# EAGLE board demeter (EAGLE 6.2)
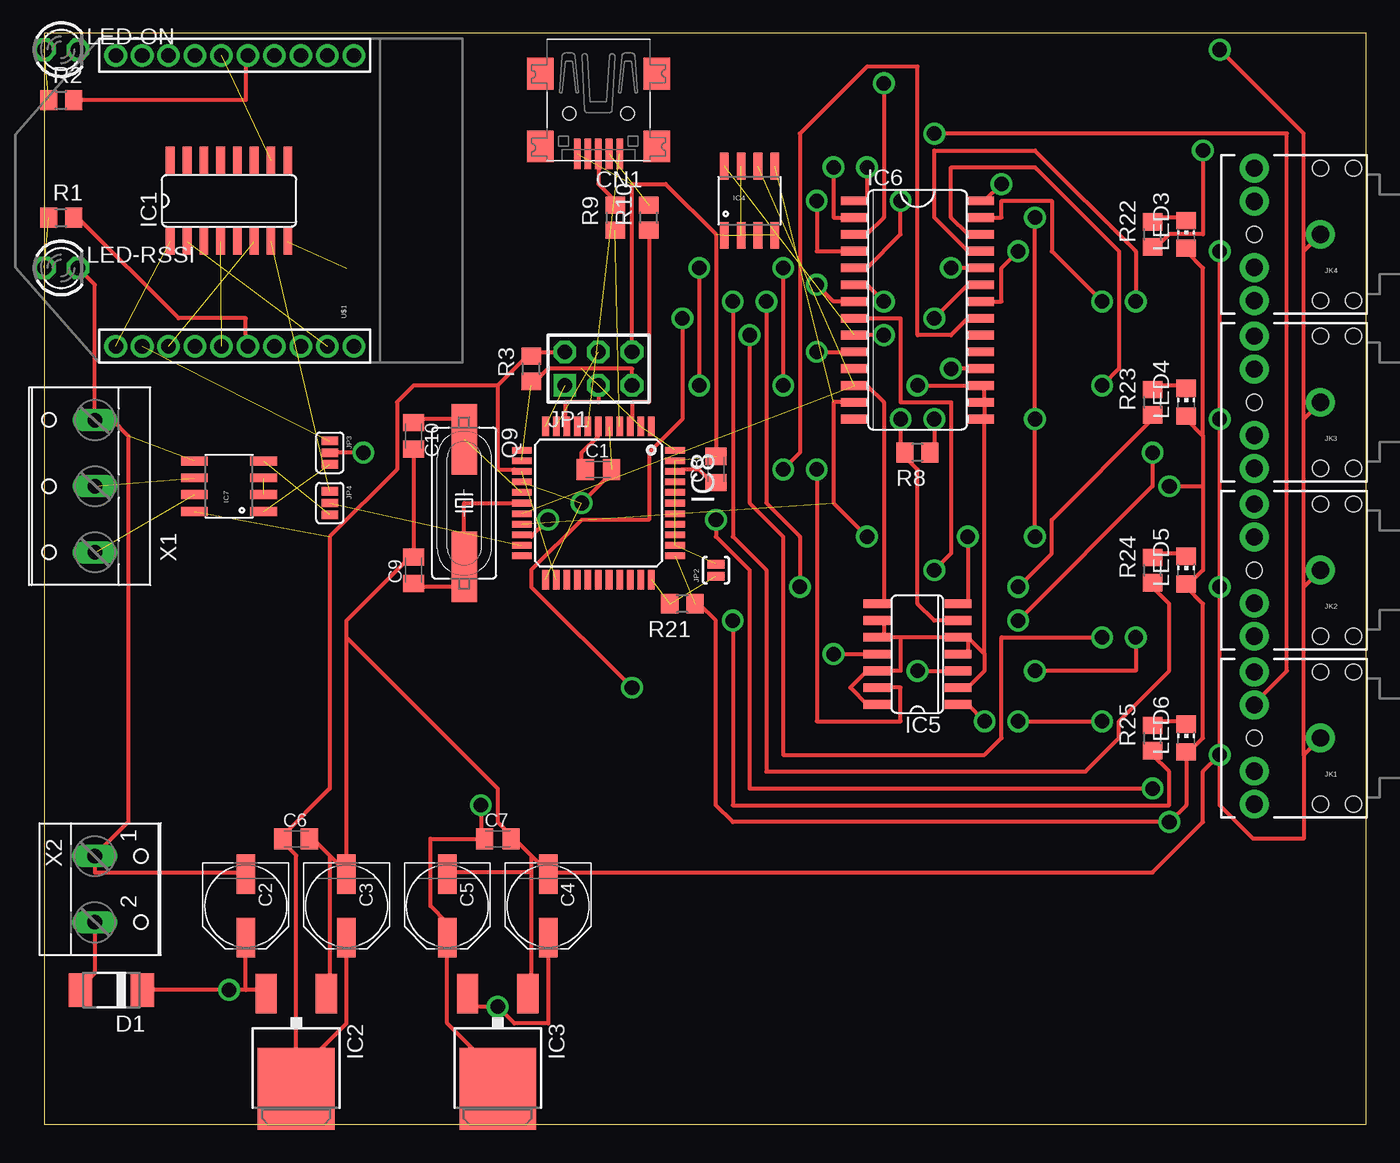
[diagram p0: board, top side]
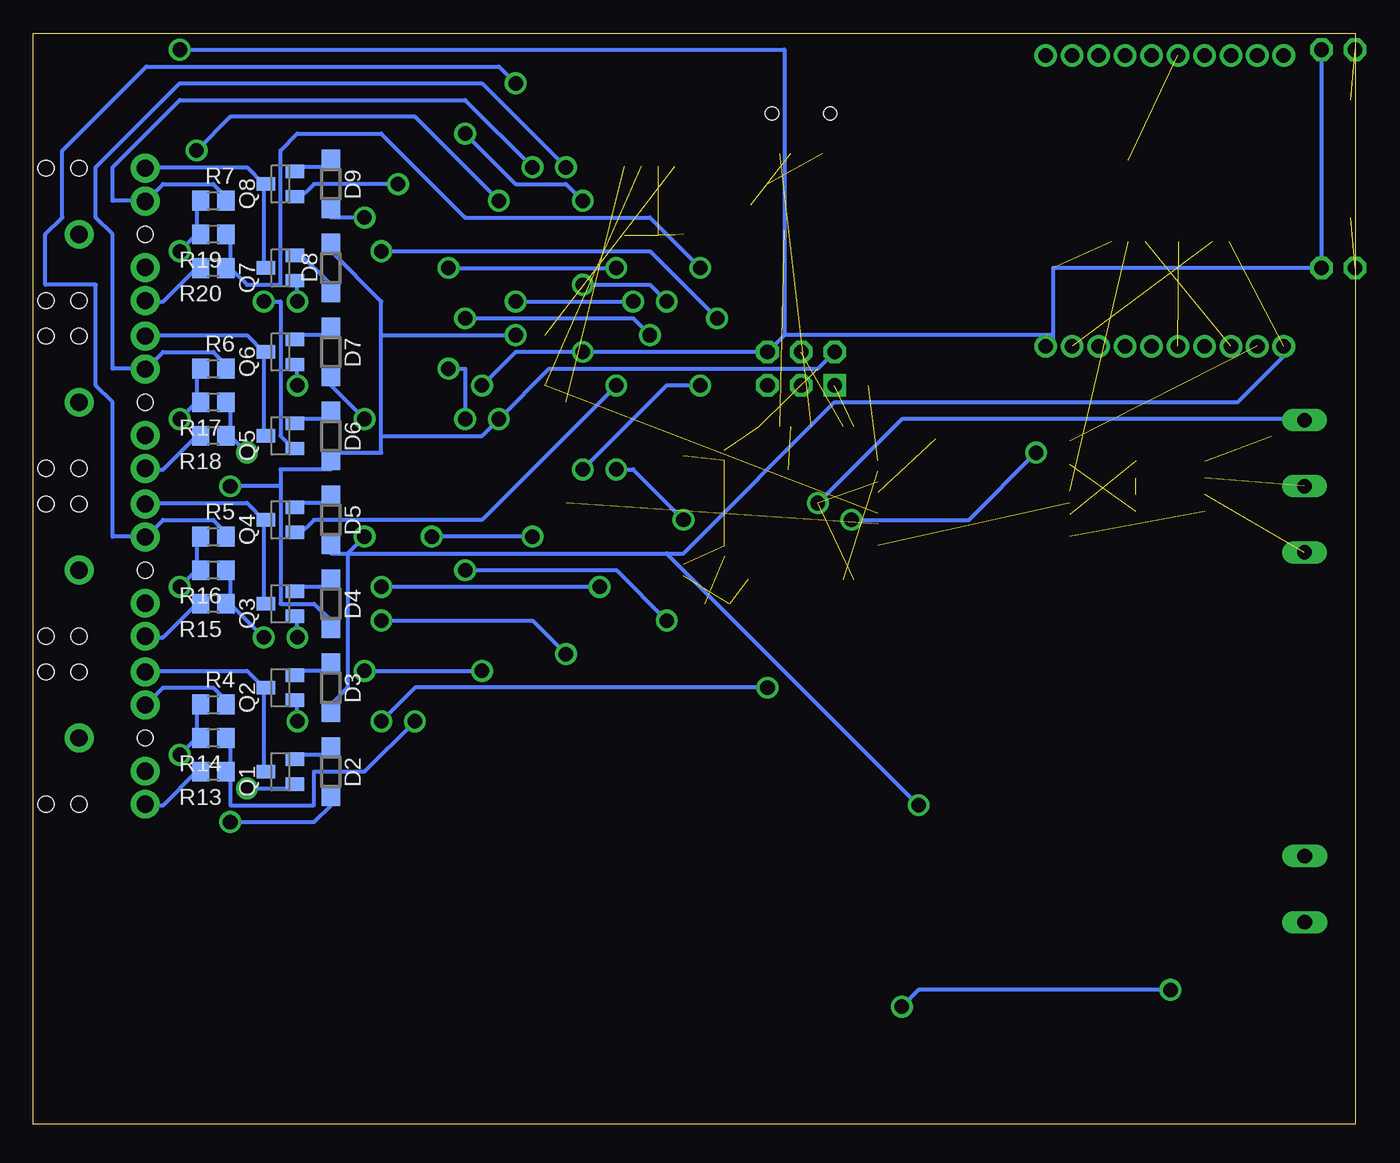
[diagram p1: board, bottom side, seen from below]

Size 100 x 82.54 mm. Coordinates in mm from the lower left corner, seen from the top.
Outline: 0,0 100,0 100,82.54 0,82.54 0,0
Copper layers (1*16): Top 0.035mm / dielectric 1.5mm / Bottom 0.035mm
Design rules: minimum track width 12mil, minimum drill 1.1mm, track to track 8mil, track to pad 8mil, pad to pad 8mil, via to via 8mil, smd to smd 8mil, copper to edge 10mil, drill to drill 8mil, minimum pad ring 12mil, minimum via ring 10mil, stop-mask expansion 4mil, vias tented up to drill 25mil, thermal gap 10mil

## Footprints (pad centres in the part's own frame; a part is rotated, then mirrored left to right if it is on the bottom)
C0805K = smd 1.3 x 1.6: 1 -1,0; 2 1,0
PANASONIC_D = smd 3 x 1.4: + 2.4,0; - -2.4,0
USB-MINIB = smd 0.5 x 2.308: D+ 0,4.064; D- -0.8,4.064; GND 1.6,4.064; ID 0.8,4.064; VBUS -1.6,4.064 | smd 2 x 2.4: GND1 -4.4,-2; GND2 -4.4,3.5; GND3 4.4,3.5; GND4 4.4,-2 | hole 1: -2.2,1; 2.2,1
DO-214AC = smd 1.778 x 2.54: A 2.342,0; C -2.342,0
SOD123 = smd 1.4 x 1.4: A 1.9,0; C -1.9,0
SO16 = smd 0.66 x 2.032: 1 -4.445,-3.073; 2 -3.175,-3.073; 3 -1.905,-3.073; 4 -0.635,-3.073; 5 0.635,-3.073; 6 1.905,-3.073; 7 3.175,-3.073; 8 4.445,-3.073; 9 4.445,3.073; 10 3.175,3.073; 11 1.905,3.073; 12 0.635,3.073; 13 -0.635,3.073; 14 -1.905,3.073; 15 -3.175,3.073; 16 -4.445,3.073
DPACK = smd 1.6 x 3: 1 -2.28,-4.8; 3 2.28,-4.8 | smd 5.8 x 6.2: 4 0,2.38
SO08 = smd 0.66 x 2.032: 1 -1.905,-2.616; 2 -0.635,-2.616; 3 0.635,-2.616; 4 1.905,-2.616; 5 1.905,2.616; 6 0.635,2.616; 7 -0.635,2.616; 8 -1.905,2.616
SO14 = smd 2.032 x 0.66: 1 -3.073,3.81; 2 -3.073,2.54; 3 -3.073,1.27; 4 -3.073,0; 5 -3.073,-1.27; 6 -3.073,-2.54; 7 -3.073,-3.81; 8 3.073,-3.81; 9 3.073,-2.54; 10 3.073,-1.27; 11 3.073,0; 12 3.073,1.27; 13 3.073,2.54; 14 3.073,3.81
SO28W = smd 0.66 x 2.032: 1 -7.62,-4.78; 2 -6.35,-4.78; 3 -5.08,-4.78; 4 -3.81,-4.78; 5 -2.54,-4.78; 6 -1.27,-4.78; 7 0,-4.78; 8 1.27,-4.78; 9 2.54,-4.78; 10 3.81,-4.78; 11 5.08,-4.78; 12 6.35,-4.78; 13 7.62,-4.78; 14 8.89,-4.78; 15 8.89,4.78; 16 7.62,4.78; 17 6.35,4.78; 18 5.08,4.78; 19 3.81,4.78; 20 2.54,4.78; 21 1.27,4.78; 22 0,4.78; 23 -1.27,4.78; 24 -2.54,4.78; 25 -3.81,4.78; 26 -5.08,4.78; 27 -6.35,4.78; 28 -7.62,4.78
TQFP44 = smd 1.5 x 0.5: 1 -5.8,4; 2 -5.8,3.2; 3 -5.8,2.4; 4 -5.8,1.6; 5 -5.8,0.8; 6 -5.8,0; 7 -5.8,-0.8; 8 -5.8,-1.6; 9 -5.8,-2.4; 10 -5.8,-3.2; 11 -5.8,-4; 23 5.8,-4; 24 5.8,-3.2; 25 5.8,-2.4; 26 5.8,-1.6; 27 5.8,-0.8; 28 5.8,0; 29 5.8,0.8; 30 5.8,1.6; 31 5.8,2.4; 32 5.8,3.2; 33 5.8,4 | smd 0.5 x 1.5: 12 -4,-5.8; 13 -3.2,-5.8; 14 -2.4,-5.8; 15 -1.6,-5.8; 16 -0.8,-5.8; 17 0,-5.8; 18 0.8,-5.8; 19 1.6,-5.8; 20 2.4,-5.8; 21 3.2,-5.8; 22 4,-5.8; 34 4,5.8; 35 3.2,5.8; 36 2.4,5.8; 37 1.6,5.8; 38 0.8,5.8; 39 0,5.8; 40 -0.8,5.8; 41 -1.6,5.8; 42 -2.4,5.8; 43 -3.2,5.8; 44 -4,5.8
AUDIO-JACK = drill 1.3 pad 2.184: RING 5,5; RSH 5,2.5; SLEEVE 0,0; TIP 5,-5; TSH 5,-2.5 | hole 1.2: 0,5; -2.5,5; -2.5,-5; 0,-5; 5,0
AVR-ISP-6 = drill 1.1 square: 1 -2.54,-1.27 | drill 1.1 octagon: 2 -2.54,1.27; 3 0,-1.27; 4 0,1.27; 5 2.54,-1.27; 6 2.54,1.27
SJ_2S-NO = smd 0.635 x 1.27: 1 -0.45,0; 2 0.45,0
SJ_3 = smd 0.635 x 1.27: 1 -0.889,0; 2 0,0; 3 0.889,0
CHIP-LED0805 = smd 1.5 x 1.3: A 0,-1.05; C 0,1.05
LED3MM = drill 1.1 octagon: A -1.27,0; K 1.27,0
SOT23 = smd 1 x 1.4: 1 -0.95,-1.1; 2 0.95,-1.1; 3 0,1.1
HC49UP = smd 5.334 x 1.93: 1 -4.826,0; 2 4.826,0
R0805 = smd 1.3 x 1.5: 1 -0.95,0; 2 0.95,0
XBEE-1 = drill 1.1: 1 -11,20; 2 -11,18; 3 -11,16; 4 -11,14; 5 -11,12; 6 -11,10; 7 -11,8; 8 -11,6; 9 -11,4; 10 -11,2; 11 11,2; 12 11,4; 13 11,6; 14 11,8; 15 11,10; 16 11,12; 17 11,14; 18 11,16; 19 11,18; 20 11,20
W237-103 = drill 1.1 long: 1 -5,-1.29; 2 0,-1.29; 3 5,-1.29
W237-102 = drill 1.1 long: 1 -2.5,-1.27; 2 2.5,-1.27

## Placement (x,y rotation side)
C1  1uF  [C0805K]  41.91,49.53 0 top
C2  22uF  [PANASONIC_D]  15.24,16.51 270 top
C3  100uF  [PANASONIC_D]  22.86,16.51 270 top
C4  22uF  [PANASONIC_D]  38.1,16.51 270 top
C5  100uF  [PANASONIC_D]  30.48,16.51 270 top
C6  100nF  [C0805K]  19.05,21.59 0 top
C7  100nF  [C0805K]  34.29,21.59 0 top
C8  100nF  [C0805K]  50.8,49.53 90 top
C9  22pF  [C0805K]  27.94,41.91 90 top
C10  22pF  [C0805K]  27.94,52.07 270 top
CN1  [USB-MINIB]  41.91,77.47 180 top
D1  S1M  [DO-214AC]  5.08,10.16 180 top
D2  [SOD123]  77.47,26.67 270 bottom
D3  [SOD123]  77.47,33.02 270 bottom
D4  [SOD123]  77.47,39.37 270 bottom
D5  [SOD123]  77.47,45.72 270 bottom
D6  [SOD123]  77.47,52.07 270 bottom
D7  [SOD123]  77.47,58.42 270 bottom
D8  [SOD123]  77.47,64.77 90 bottom
D9  [SOD123]  77.47,71.12 270 bottom
IC1  4050  [SO16]  13.97,69.85 0 top
IC2  LM1117-5.0  [DPACK]  19.05,5.08 180 top
IC3  LM1117-3.3  [DPACK]  34.29,5.08 180 top
IC4  M24C64  [SO08]  53.34,69.85 0 top
IC5  MCP3424  [SO14]  66.04,35.56 180 top
IC6  MCP23017SO  [SO28W]  66.04,62.23 270 top
IC7  MAX485  [SO08]  13.97,48.26 90 top
IC8  ATMEGA32U4-AU  [TQFP44]  41.91,46.99 270 top
JK1  [AUDIO-JACK]  96.52,29.21 180 top
JK2  [AUDIO-JACK]  96.52,41.91 180 top
JK3  [AUDIO-JACK]  96.52,54.61 180 top
JK4  [AUDIO-JACK]  96.52,67.31 180 top
JP1  AVR-ISP-6  [AVR-ISP-6]  41.91,57.15 0 top
JP2  [SJ_2S-NO]  50.8,41.91 90 top
JP3  JUMPER-3SMD  [SJ_3]  21.59,50.8 270 top
JP4  JUMPER-3SMD  [SJ_3]  21.59,46.99 270 top
LED3  [CHIP-LED0805]  86.36,67.31 0 top
LED4  [CHIP-LED0805]  86.36,54.61 0 top
LED5  [CHIP-LED0805]  86.36,41.91 0 top
LED6  [CHIP-LED0805]  86.36,29.21 0 top
LED-ON  [LED3MM]  1.27,81.28 0 top
LED-RSSI  [LED3MM]  1.27,64.77 0 top
Q1  IRLML6402  [SOT23]  81.28,26.67 90 bottom
Q2  [SOT23]  81.28,33.02 90 bottom
Q3  IRLML6402  [SOT23]  81.28,39.37 90 bottom
Q4  [SOT23]  81.28,45.72 90 bottom
Q5  IRLML6402  [SOT23]  81.28,52.07 90 bottom
Q6  [SOT23]  81.28,58.42 90 bottom
Q7  IRLML6402  [SOT23]  81.28,64.77 90 bottom
Q8  [SOT23]  81.28,71.12 90 bottom
Q9  [HC49UP]  31.75,46.99 270 top
R1  [R0805]  1.27,68.58 0 top
R2  [R0805]  1.27,77.47 0 top
R3  [R0805]  36.83,57.15 90 top
R4  [R0805]  86.36,31.75 0 bottom
R5  [R0805]  86.36,44.45 0 bottom
R6  [R0805]  86.36,57.15 0 bottom
R7  [R0805]  86.36,69.85 0 bottom
R8  [R0805]  66.04,50.8 180 top
R9  22  [R0805]  43.18,68.58 90 top
R10  22  [R0805]  45.72,68.58 90 top
R13  [R0805]  86.36,26.67 180 bottom
R14  [R0805]  86.36,29.21 180 bottom
R15  [R0805]  86.36,39.37 180 bottom
R16  [R0805]  86.36,41.91 180 bottom
R17  [R0805]  86.36,54.61 180 bottom
R18  [R0805]  86.36,52.07 180 bottom
R19  [R0805]  86.36,67.31 180 bottom
R20  [R0805]  86.36,64.77 180 bottom
R21  [R0805]  48.26,39.37 180 top
R22  [R0805]  83.82,67.31 90 top
R23  [R0805]  83.82,54.61 90 top
R24  [R0805]  83.82,41.91 90 top
R25  [R0805]  83.82,29.21 90 top
U$1  XBEE-1B1  [XBEE-1]  25.4,69.85 90 top
X1  [W237-103]  2.54,48.26 90 top
X2  [W237-102]  5.08,17.78 270 top

## Library data of the parts
C1-C10 CN1 D1-D9 IC1-IC4 IC7 IC8 JK1-JK4 JP1-JP4 LED3-LED6 Q1-Q9 R1-R10 R13-R25 U$1 X1 X2 = mark_2
IC5 = mark_2; MPN: MCP3424-E/SL; OC_FARNELL: 1630424; OC_NEWARK: 54M4871; PACKAGE: SOIC-14; SUPPLIER: Microchip
IC6 = mark_2; MF: MICROCHIP; MPN: MCP23017-E/SO; OC_FARNELL: 1332087; OC_NEWARK: 31K2958
LED-ON LED-RSSI = mark_1

## Nets
+3V3: C5.+ C7.1 D3.A D5.A D7.A D9.A IC1.1 IC3.4 U$1.1
+5V: C3.+ C6.1 D2.A D4.A D6.A D8.A IC2.4 IC4.8 IC5.6 IC6.9 IC7.8 IC8.2 IC8.14 IC8.24 IC8.34 IC8.44 JP1.2 LED3.A LED4.A LED5.A LED6.A R3.2 R8.2 R21.1
+12V: C2.+ C4.+ D1.C IC2.3 IC3.3
CH1: IC5.1 R13.1 R14.1
CH2: IC5.3 R15.1 R16.1
CH3: IC5.11 R17.1 R18.1
CH4: IC5.13 R19.1 R20.1
CTS: U$1.12
D+: IC8.4 R9.1
D-: IC8.3 R10.1
DI: IC7.4 JP4.3
DIN: IC1.7 JP4.1
DOUT: JP3.1 U$1.2
DTR: IC1.3
EN: IC7.2 IC7.3
EN1-3: IC6.22 Q2.1
EN1-5: IC6.21 Q1.1
EN2-3: IC6.24 Q4.1
EN2-5: IC6.23 Q3.1
EN3-3: IC6.26 Q6.1
EN3-5: IC6.25 Q5.1
EN4-3: IC6.28 Q8.1
EN4-5: IC6.27 Q7.1
GND: C1.2 C2.- C3.- C4.- C5.- C6.2 C7.2 C8.2 C9.2 C10.2 CN1.GND IC1.8 IC2.1 IC3.1 IC4.1 IC4.2 IC4.3 IC4.4 IC4.7 IC5.2 IC5.4 IC5.5 IC5.9 IC5.10 IC5.12 IC5.14 IC6.10 IC6.15 IC6.16 IC6.17 IC7.5 IC8.5 IC8.15 IC8.23 IC8.35 IC8.43 JK1.SLEEVE JK2.SLEEVE JK3.SLEEVE JK4.SLEEVE JP1.6 JP2.2 LED-ON.K LED-RSSI.K R4.1 R5.1 R6.1 R7.1 R14.2 R16.2 R17.2 R19.2 U$1.10 X1.3 X2.1
MISO: IC8.11 JP1.1
MOSI: IC8.10 JP1.4
N$1: D1.A X2.2
N$2: IC7.7 X1.1
N$3: IC1.6 U$1.3
N$4: IC1.4 U$1.5
N$5: IC7.6 X1.2
N$6: LED-RSSI.A R1.1
N$7: IC1.2 U$1.9
N$8: IC1.10 U$1.16
N$9: LED-ON.A R2.1
N$10: R2.2 U$1.15
N$11: IC6.18 R8.1
N$12: JK1.TIP Q1.3 Q2.3
N$13: D2.C Q1.2
N$14: D3.C Q2.2
N$15: JK2.TIP Q3.3 Q4.3
N$16: D4.C Q3.2
N$17: D5.C Q4.2
N$18: JK3.TIP Q5.3 Q6.3
N$19: D6.C Q5.2
N$20: D7.C Q6.2
N$21: JK4.TIP Q7.3 Q8.3
N$22: D8.C Q7.2
N$23: D9.C Q8.2
N$24: C1.1 IC8.6
N$25: C8.1 IC8.42
N$26: C9.1 IC8.17 Q9.2
N$27: C10.1 IC8.16 Q9.1
N$28: CN1.D+ R9.2
N$29: CN1.D- R10.2
N$30: JK1.RING R13.2
N$32: JK2.RING R15.2
N$34: JK3.RING R18.2
N$35: JK4.RING R20.2
N$36: IC8.33 JP2.1 R21.2
N$37: LED3.C R22.2
N$39: LED4.C R23.2
N$40: LED5.C R24.2
N$41: LED6.C R25.2
N$42: IC6.8 R25.1
N$43: IC6.7 R24.1
N$44: IC6.6 R23.1
N$45: IC6.5 R22.1
RESET: IC1.5
RO: IC7.1 JP3.3
RSSI: R1.2 U$1.6
RST: IC8.13 JP1.5 R3.1
RTS: IC1.9
RX: IC8.20 JP3.2
SCK: IC8.9 JP1.3
SCL: IC4.6 IC5.8 IC6.12 IC8.18
SDA: IC4.5 IC5.7 IC6.13 IC8.19
SN1: IC6.4 JK1.TSH R4.2
SN2: IC6.3 JK2.TSH R5.2
SN3: IC6.2 JK3.TSH R6.2
SN4: IC6.1 JK4.TSH R7.2
TX: IC8.21 JP4.2
VBUS: CN1.VBUS IC8.7

## Tracks (layer width: path | path; a pad name or v marks a point on that pad's centre or on a via)
+3V3  (via drill 1.1)  (1 unrouted)
  Top 0.305: 33.02,21.59 29.21,21.59 29.21,16.51 30.48,15.24 C5.+ 30.48,7.62 34.29,3.81 IC3.4 | v74.93,44.45 v74.93,53.34 v74.93,68.58 | v33.02,24.13 33.02,21.59 | 33.02,21.59 C7.1
  Bottom 0.305: 76.2,43.18 76.2,33.02 77.47,31.75 D3.A | 76.2,43.18 77.47,43.18 D5.A | v74.93,53.34 77.47,55.88 D7.A | 76.2,43.18 v74.93,44.45 | v74.93,68.58 77.47,68.58 D9.A | 76.2,43.18 52.07,43.18 | 52.07,43.18 50.8,43.18 39.37,54.61 8.89,54.61 5.08,58.42 U$1.1 | 52.07,43.18 v33.02,24.13
+5V  (via drill 1.1)  (6 unrouted)
  Top 0.305: 86.36,40.64 87.63,41.91 87.63,48.26 | 87.63,52.07 87.63,48.26 | 87.63,52.07 86.36,53.34 LED4.A | 87.63,52.07 87.63,64.77 86.36,66.04 LED3.A | 86.36,27.94 86.36,24.13 v85.09,22.86 52.07,22.86 50.8,24.13 50.8,38.1 49.53,39.37 R21.1 | 86.36,40.64 87.63,39.37 87.63,29.21 86.36,27.94 | 86.36,40.64 LED5.A | 86.36,27.94 LED6.A | 17.78,21.59 19.05,20.32 19.05,3.81 | C3.+ 22.86,7.62 19.05,3.81 | 19.05,3.81 IC2.4 | 64.77,50.8 66.04,49.53 66.04,39.37 67.31,38.1 IC5.6 | 34.29,55.88 34.29,49.53 35.56,49.53 IC8.14 | 36.83,58.42 34.29,55.88 | 36.83,58.42 JP1.2 | 36.83,58.42 R3.2 | v63.5,59.69 IC6.9 | v64.77,53.34 64.77,50.8 | 64.77,50.8 R8.2 | 17.78,21.59 21.59,25.4 21.59,44.45 26.67,49.53 26.67,54.61 27.94,55.88 34.29,55.88 | 17.78,21.59 C6.1 | v85.09,48.26 87.63,48.26
  Bottom 0.305: v85.09,22.86 78.74,22.86 77.47,24.13 D2.A | 81.28,48.26 81.28,49.53 77.47,49.53 D6.A 77.47,50.8 73.66,50.8 73.66,52.07 | 81.28,48.26 81.28,39.37 78.74,39.37 77.47,38.1 D4.A | 73.66,52.07 73.66,59.69 | 73.66,59.69 73.66,62.23 77.47,66.04 D8.A | 73.66,59.69 v63.5,59.69 | JP1.2 40.64,57.15 60.96,57.15 v64.77,53.34 66.04,52.07 73.66,52.07 | 81.28,48.26 v85.09,48.26
+12V  (via drill 1.1)
  Top 0.305: C4.+ 38.1,7.62 35.56,7.62 v34.29,8.89 31.75,8.89 IC3.3 | 15.24,10.16 16.51,10.16 IC2.3 | 15.24,10.16 v13.97,10.16 D1.C | 15.24,10.16 C2.+
  Bottom 0.305: v34.29,8.89 33.02,10.16 v13.97,10.16
CH1  (via drill 1.1)
  Top 0.305: v71.12,30.48 69.85,31.75 IC5.1
  Bottom 0.305: 85.09,26.67 85.09,29.21 R14.1 | v71.12,30.48 74.93,26.67 78.74,26.67 78.74,24.13 85.09,24.13 85.09,26.67 | 85.09,26.67 R13.1
CH2  (via drill 1.1)
  Top 0.305: v66.04,34.29 IC5.3 | v74.93,34.29 82.55,34.29 v82.55,36.83
  Bottom 0.305: 85.09,39.37 85.09,41.91 R16.1 | v74.93,34.29 v66.04,34.29 | 85.09,39.37 v82.55,36.83 | 85.09,39.37 R15.1
CH3  (via drill 1.1)
  Top 0.305: v59.69,35.56 IC5.11 | v73.66,38.1 83.82,48.26 v83.82,50.8
  Bottom 0.305: 85.09,52.07 85.09,54.61 R17.1 | v59.69,35.56 62.23,38.1 v73.66,38.1 | 85.09,52.07 v83.82,50.8 | 85.09,52.07 R18.1
CH4  (via drill 1.1)
  Top 0.305: IC5.13 64.77,33.02 64.77,30.48 58.42,30.48 v58.42,49.53 | v49.53,64.77 v49.53,55.88
  Bottom 0.305: 85.09,64.77 85.09,67.31 R19.1 | v58.42,49.53 52.07,55.88 v49.53,55.88 | v49.53,64.77 53.34,68.58 67.31,68.58 73.66,74.93 80.01,74.93 81.28,73.66 81.28,63.5 83.82,63.5 85.09,64.77 | 85.09,64.77 R20.1
D+  (1 unrouted)
D-
  Top 0.305: R10.1 45.72,54.61 44.45,54.61 44.45,53.34 IC8.3
DI  (1 unrouted)
DIN  (1 unrouted)
DOUT  (1 unrouted)
EN  (1 unrouted)
EN1-3  (via drill 1.1)
  Top 0.305: v73.66,30.48 v80.01,30.48 | v44.45,33.02 36.83,40.64 36.83,41.91 40.64,45.72 45.72,45.72 45.72,50.8 48.26,53.34 v48.26,60.96 | v73.66,66.04 72.39,64.77 72.39,62.23 IC6.22
  Bottom 0.305: v80.01,30.48 80.01,31.75 Q2.1 | v73.66,30.48 71.12,33.02 v44.45,33.02 | v48.26,60.96 53.34,66.04 v73.66,66.04
EN1-5  (via drill 1.1)
  Top 0.305: v83.82,25.4 53.34,25.4 53.34,41.91 50.8,44.45 v50.8,45.72 | v55.88,49.53 57.15,50.8 57.15,74.93 62.23,80.01 66.04,80.01 66.04,59.69 68.58,59.69 69.85,60.96 IC6.21
  Bottom 0.305: v83.82,25.4 80.01,25.4 Q1.1 | v50.8,45.72 54.61,49.53 v55.88,49.53
EN2-3  (via drill 1.1)
  Top 0.305: v55.88,64.77 v55.88,55.88 | IC6.24 v68.58,64.77
  Bottom 0.305: v55.88,55.88 66.04,45.72 78.74,45.72 80.01,44.45 Q4.1 | v68.58,64.77 v55.88,64.77
EN2-5  (via drill 1.1)
  Top 0.305: v80.01,36.83 72.39,36.83 72.39,29.21 71.12,27.94 55.88,27.94 55.88,44.45 53.34,46.99 v53.34,59.69 | v67.31,60.96 69.85,63.5 IC6.23
  Bottom 0.305: v80.01,36.83 80.01,38.1 Q3.1 | v53.34,59.69 54.61,60.96 v67.31,60.96
EN3-3  (via drill 1.1)
  Top 0.305: v80.01,55.88 81.28,57.15 81.28,66.04 74.93,72.39 68.58,72.39 68.58,68.58 69.85,67.31 IC6.26
  Bottom 0.305: v80.01,55.88 80.01,57.15 Q6.1
EN3-5  (via drill 1.1)
  Top 0.305: v82.55,62.23 82.55,66.04 74.93,73.66 67.31,73.66 67.31,68.58 69.85,66.04 IC6.25
  Bottom 0.305: v82.55,62.23 81.28,62.23 81.28,52.07 80.01,50.8 Q5.1
EN4-3  (via drill 1.1)
  Top 0.305: v72.39,71.12 71.12,69.85 IC6.28
  Bottom 0.305: v72.39,71.12 78.74,71.12 80.01,69.85 Q8.1
EN4-5  (via drill 1.1)
  Top 0.305: v80.01,62.23 76.2,66.04 76.2,69.85 72.39,69.85 72.39,68.58 IC6.27
  Bottom 0.305: v80.01,62.23 80.01,63.5 Q7.1
GND  (via drill 1.1)  (14 unrouted)
  Top 0.305: IC5.14 62.23,31.75 60.96,33.02 62.23,34.29 IC5.12 64.77,34.29 64.77,36.83 | 71.12,54.61 71.12,53.34 | 71.12,54.61 71.12,55.88 IC6.17 v66.04,55.88 | 71.12,54.61 IC6.16 | 63.5,36.83 63.5,38.1 IC5.9 | 71.12,35.56 71.12,34.29 69.85,33.02 IC5.2 | 69.85,36.83 71.12,35.56 | 69.85,36.83 69.85,35.56 IC5.4 | 69.85,36.83 IC5.5 64.77,36.83 | 64.77,36.83 63.5,36.83 | 63.5,36.83 IC5.10 | 71.12,35.56 71.12,53.34 | 71.12,53.34 IC6.15 | C8.2 50.8,67.31 46.99,71.12 44.45,71.12 JP1.6 | v58.42,58.42 IC6.10 | C2.- 15.24,19.05 3.81,19.05 X2.1 3.81,20.32 6.35,22.86 6.35,52.07 5.08,53.34 X1.3 3.81,53.34 3.81,63.5 LED-RSSI.K | v40.64,46.99 43.18,49.53 C1.2 | v88.9,27.94 88.9,24.13 91.44,21.59 95.25,21.59 95.25,27.94 | JK1.SLEEVE 95.25,27.94 | v88.9,27.94 v88.9,40.64 v88.9,53.34 v88.9,66.04 | 95.25,40.64 JK2.SLEEVE | 95.25,27.94 95.25,40.64 | 95.25,53.34 JK3.SLEEVE | 95.25,40.64 95.25,53.34 | 95.25,66.04 JK4.SLEEVE | 95.25,53.34 95.25,66.04 | 38.1,19.05 36.83,20.32 | 36.83,20.32 35.56,21.59 | 36.83,20.32 36.83,19.05 | 36.83,19.05 36.83,10.16 IC3.1 | 36.83,19.05 30.48,19.05 C5.- | C10.2 27.94,43.18 | 22.86,19.05 21.59,20.32 | 21.59,20.32 20.32,21.59 C6.2 | 21.59,20.32 21.59,10.16 IC2.1 | 27.94,43.18 22.86,38.1 22.86,36.83 | 22.86,19.05 22.86,36.83 | 27.94,43.18 C9.2 | 22.86,19.05 C3.- | 35.56,21.59 34.29,22.86 34.29,25.4 22.86,36.83 | 35.56,21.59 C7.2 | v88.9,27.94 87.63,26.67 87.63,22.86 83.82,19.05 38.1,19.05 | 38.1,19.05 C4.- | v88.9,81.28 95.25,74.93 95.25,66.04
  Bottom 0.305: v66.04,55.88 63.5,58.42 v58.42,58.42 JP1.6 43.18,59.69 | v40.64,46.99 34.29,53.34 5.08,53.34 X1.3 | LED-ON.K LED-RSSI.K 22.86,64.77 22.86,59.69 | 22.86,59.69 22.86,58.42 U$1.10 | 22.86,59.69 43.18,59.69 | 87.63,67.31 87.63,69.85 R7.1 | 87.63,54.61 87.63,57.15 R6.1 | 87.63,41.91 87.63,44.45 R5.1 | 87.63,29.21 87.63,31.75 R4.1 | v88.9,27.94 87.63,29.21 | 87.63,29.21 R14.2 | v88.9,40.64 87.63,41.91 | 87.63,41.91 R16.2 | v88.9,53.34 87.63,54.61 | 87.63,54.61 R17.2 | v88.9,66.04 87.63,67.31 | 87.63,67.31 R19.2 | 43.18,59.69 43.18,81.28 v88.9,81.28
MISO  (1 unrouted)
MOSI  (1 unrouted)
N$1
  Top 0.305: X2.2 3.81,11.43 2.54,10.16 D1.A
N$2  (1 unrouted)
N$3  (1 unrouted)
N$4  (1 unrouted)
N$5  (1 unrouted)
N$6  (1 unrouted)
N$7  (1 unrouted)
N$8  (1 unrouted)
N$9  (1 unrouted)
N$10
  Top 0.305: R2.2 15.24,77.47 15.24,80.01 U$1.15
N$11  (via drill 1.1)
  Top 0.305: v67.31,53.34 67.31,50.8 R8.1 | IC6.18 v68.58,57.15
  Bottom 0.305: v67.31,53.34 67.31,57.15 v68.58,57.15
N$12
  Bottom 0.305: 82.55,33.02 82.55,26.67 Q1.3 | 82.55,33.02 83.82,34.29 91.44,34.29 JK1.TIP | 82.55,33.02 Q2.3
N$13
  Bottom 0.305: Q1.2 80.01,27.94 77.47,27.94 D2.C
N$14
  Bottom 0.305: Q2.2 80.01,34.29 77.47,34.29 D3.C
N$15
  Bottom 0.305: 82.55,45.72 82.55,39.37 Q3.3 | 82.55,45.72 83.82,46.99 91.44,46.99 JK2.TIP | 82.55,45.72 Q4.3
N$16
  Bottom 0.305: Q3.2 80.01,40.64 77.47,40.64 D4.C
N$17
  Bottom 0.305: Q4.2 80.01,46.99 77.47,46.99 D5.C
N$18
  Bottom 0.305: 82.55,58.42 82.55,52.07 Q5.3 | 82.55,58.42 83.82,59.69 91.44,59.69 JK3.TIP | 82.55,58.42 Q6.3
N$19
  Bottom 0.305: Q5.2 80.01,53.34 77.47,53.34 D6.C
N$20
  Bottom 0.305: Q6.2 80.01,59.69 77.47,59.69 D7.C
N$21
  Bottom 0.305: 82.55,71.12 82.55,64.77 Q7.3 | 82.55,71.12 83.82,72.39 91.44,72.39 JK4.TIP | 82.55,71.12 Q8.3
N$22
  Bottom 0.305: D8.C 77.47,63.5 80.01,66.04 Q7.2
N$23
  Bottom 0.305: Q8.2 80.01,72.39 77.47,72.39 D9.C
N$24
  Top 0.305: IC8.6 41.91,52.07 40.64,50.8 40.64,49.53 C1.1
N$25
  Top 0.305: IC8.42 48.26,49.53 49.53,49.53 50.8,48.26 C8.1
N$26
  Top 0.305: IC8.17 31.75,46.99 Q9.2 31.75,40.64 27.94,40.64 C9.1
N$27  (1 unrouted)
  Top 0.305: Q9.1 31.75,53.34 27.94,53.34 C10.1
N$28
  Top 0.305: CN1.D+ 41.91,71.12 43.18,69.85 R9.2
N$29  (1 unrouted)
N$30
  Bottom 0.305: R13.2 87.63,26.67 90.17,24.13 91.44,24.13 JK1.RING
N$32
  Bottom 0.305: R15.2 87.63,39.37 90.17,36.83 91.44,36.83 JK2.RING
N$34
  Bottom 0.305: R18.2 87.63,52.07 90.17,49.53 91.44,49.53 JK3.RING
N$35
  Bottom 0.305: R20.2 87.63,64.77 90.17,62.23 91.44,62.23 JK4.RING
N$36  (2 unrouted)
N$37
  Top 0.305: R22.2 83.82,68.58 86.36,68.58 LED3.C
N$39
  Top 0.305: R23.2 83.82,55.88 86.36,55.88 LED4.C
N$40
  Top 0.305: R24.2 83.82,43.18 86.36,43.18 LED5.C
N$41
  Top 0.305: R25.2 83.82,30.48 86.36,30.48 LED6.C
N$42  (via drill 1.1)
  Top 0.305: v52.07,38.1 52.07,24.13 85.09,24.13 85.09,26.67 83.82,27.94 R25.1 | v67.31,41.91 68.58,43.18 68.58,54.61 64.77,54.61 64.77,60.96 IC6.8
  Bottom 0.305: v52.07,38.1 55.88,41.91 v67.31,41.91
N$43  (via drill 1.1)
  Top 0.305: v52.07,62.23 52.07,44.45 54.61,41.91 54.61,26.67 78.74,26.67 81.28,29.21 81.28,30.48 85.09,34.29 85.09,39.37 83.82,40.64 R24.1 | v58.42,63.5 59.69,62.23 IC6.7
  Bottom 0.305: v52.07,62.23 53.34,63.5 v58.42,63.5
N$44  (via drill 1.1)
  Top 0.305: v73.66,40.64 76.2,43.18 76.2,45.72 83.82,53.34 R23.1 | v57.15,40.64 57.15,44.45 54.61,46.99 v54.61,62.23 | v63.5,62.23 62.23,63.5 IC6.6
  Bottom 0.305: v57.15,40.64 v73.66,40.64 | v63.5,62.23 v54.61,62.23
N$45  (via drill 1.1)
  Top 0.305: v87.63,73.66 87.63,67.31 85.09,67.31 83.82,66.04 R22.1 | v64.77,69.85 64.77,67.31 62.23,64.77 IC6.5
  Bottom 0.305: v87.63,73.66 85.09,76.2 71.12,76.2 v64.77,69.85
RO  (1 unrouted)
RSSI
  Top 0.305: R1.2 2.54,68.58 10.16,60.96 15.24,60.96 15.24,59.69 U$1.6
RST  (1 unrouted)
  Top 0.305: JP1.5 44.45,57.15 38.1,57.15 36.83,55.88 R3.1
RX  (via drill 1.1)
  Top 0.305: v24.13,50.8 JP3.2 | v38.1,45.72 36.83,44.45 IC8.20
  Bottom 0.305: v24.13,50.8 29.21,45.72 v38.1,45.72
SCK
  Top 0.305: JP1.3 41.91,54.61 39.37,54.61 39.37,53.34 IC8.9
SCL  (2 unrouted)
  Top 0.305: IC5.8 63.5,39.37 63.5,54.61 62.23,55.88 IC6.12
SDA  (via drill 1.1)  (2 unrouted)
  Top 0.305: v69.85,44.45 69.85,39.37 IC5.7 | v62.23,44.45 59.69,46.99 59.69,54.61 IC6.13
  Bottom 0.305: v62.23,44.45 v69.85,44.45
SN1  (via drill 1.1)
  Top 0.305: IC6.4 58.42,66.04 v58.42,69.85 | v67.31,74.93 93.98,74.93 93.98,34.29 91.44,31.75 JK1.TSH
  Bottom 0.305: R4.2 85.09,31.75 86.36,33.02 90.17,33.02 91.44,31.75 JK1.TSH | v58.42,69.85 59.69,71.12 63.5,71.12 v67.31,74.93
SN2  (via drill 1.1)
  Top 0.305: v63.5,78.74 63.5,68.58 62.23,67.31 IC6.3
  Bottom 0.305: 91.44,44.45 90.17,45.72 86.36,45.72 85.09,44.45 R5.2 | v63.5,78.74 64.77,80.01 91.44,80.01 97.79,73.66 97.79,68.58 99.06,67.31 99.06,63.5 95.25,63.5 95.25,55.88 93.98,54.61 93.98,44.45 91.44,44.45 | 91.44,44.45 JK2.TSH
SN3  (via drill 1.1)
  Top 0.305: IC6.2 59.69,68.58 v59.69,72.39
  Bottom 0.305: 91.44,57.15 90.17,58.42 86.36,58.42 85.09,57.15 R6.2 | v59.69,72.39 66.04,78.74 88.9,78.74 95.25,72.39 95.25,68.58 93.98,67.31 93.98,57.15 91.44,57.15 | 91.44,57.15 JK3.TSH
SN4  (via drill 1.1)
  Top 0.305: v62.23,72.39 62.23,69.85 IC6.1
  Bottom 0.305: 91.44,69.85 90.17,71.12 86.36,71.12 85.09,69.85 R7.2 | v62.23,72.39 67.31,77.47 88.9,77.47 93.98,72.39 93.98,69.85 91.44,69.85 | 91.44,69.85 JK4.TSH
TX  (1 unrouted)
VBUS  (1 unrouted)